# EAGLE board 12x12_multiplexed_NSEW_headers (EAGLE 6.0)

Size 60.96 x 60.96 mm. Coordinates in mm from the lower left corner, seen from the top.
Outline: 0,0 0,60.96 60.96,60.96 60.96,0 0,0
Copper layers (1*16): Top 0.035mm / dielectric 1.5mm / Bottom 0.035mm
Design rules: minimum track width 10mil, minimum drill 24mil, track to track 8mil, track to pad 8mil, pad to pad 8mil, via to via 8mil, smd to smd 8mil, copper to edge 40mil, drill to drill 8mil, minimum pad ring 10mil, minimum via ring 8mil, stop-mask expansion 4mil, vias tented up to drill 0mil, thermal gap 10mil
Holes 3.2 mm at 5.08,5.08 5.08,55.88 55.88,5.08 55.88,55.88

## Footprints (pad centres in the part's own frame; a part is rotated, then mirrored left to right if it is on the bottom)
LED3MM = drill 0.813 octagon: A -1.27,0; K 1.27,0
1X01 = drill 1.016 octagon: 1 0,0

## Placement (x,y rotation side)
00  [LED3MM]  2.54,2.54 0 top
0A  [LED3MM]  53.34,2.54 0 top
0B  [LED3MM]  58.42,2.54 0 top
01  [LED3MM]  7.62,2.54 0 top
1A  [LED3MM]  53.34,7.62 0 top
1B  [LED3MM]  58.42,7.62 0 top
02  [LED3MM]  12.7,2.54 0 top
2A  [LED3MM]  53.34,12.7 0 top
2B  [LED3MM]  58.42,12.7 0 top
03  [LED3MM]  17.78,2.54 0 top
3A  [LED3MM]  53.34,17.78 0 top
3B  [LED3MM]  58.42,17.78 0 top
04  [LED3MM]  22.86,2.54 0 top
4A  [LED3MM]  53.34,22.86 0 top
4B  [LED3MM]  58.42,22.86 0 top
05  [LED3MM]  27.94,2.54 0 top
5A  [LED3MM]  53.34,27.94 0 top
5B  [LED3MM]  58.42,27.94 0 top
06  [LED3MM]  33.02,2.54 0 top
6A  [LED3MM]  53.34,33.02 0 top
6B  [LED3MM]  58.42,33.02 0 top
07  [LED3MM]  38.1,2.54 0 top
7A  [LED3MM]  53.34,38.1 0 top
7B  [LED3MM]  58.42,38.1 0 top
08  [LED3MM]  43.18,2.54 0 top
8A  [LED3MM]  53.34,43.18 0 top
8B  [LED3MM]  58.42,43.18 0 top
09  [LED3MM]  48.26,2.54 0 top
9A  [LED3MM]  53.34,48.26 0 top
9B  [LED3MM]  58.42,48.26 0 top
10  [LED3MM]  2.54,7.62 0 top
11  [LED3MM]  7.62,7.62 0 top
12  [LED3MM]  12.7,7.62 0 top
13  [LED3MM]  17.78,7.62 0 top
14  [LED3MM]  22.86,7.62 0 top
15  [LED3MM]  27.94,7.62 0 top
16  [LED3MM]  33.02,7.62 0 top
17  [LED3MM]  38.1,7.62 0 top
18  [LED3MM]  43.18,7.62 0 top
19  [LED3MM]  48.26,7.62 0 top
20  [LED3MM]  2.54,12.7 0 top
21  [LED3MM]  7.62,12.7 0 top
22  [LED3MM]  12.7,12.7 0 top
23  [LED3MM]  17.78,12.7 0 top
24  [LED3MM]  22.86,12.7 0 top
25  [LED3MM]  27.94,12.7 0 top
26  [LED3MM]  33.02,12.7 0 top
27  [LED3MM]  38.1,12.7 0 top
28  [LED3MM]  43.18,12.7 0 top
29  [LED3MM]  48.26,12.7 0 top
30  [LED3MM]  2.54,17.78 0 top
31  [LED3MM]  7.62,17.78 0 top
32  [LED3MM]  12.7,17.78 0 top
33  [LED3MM]  17.78,17.78 0 top
34  [LED3MM]  22.86,17.78 0 top
35  [LED3MM]  27.94,17.78 0 top
36  [LED3MM]  33.02,17.78 0 top
37  [LED3MM]  38.1,17.78 0 top
38  [LED3MM]  43.18,17.78 0 top
39  [LED3MM]  48.26,17.78 0 top
40  [LED3MM]  2.54,22.86 0 top
41  [LED3MM]  7.62,22.86 0 top
42  [LED3MM]  12.7,22.86 0 top
43  [LED3MM]  17.78,22.86 0 top
44  [LED3MM]  22.86,22.86 0 top
45  [LED3MM]  27.94,22.86 0 top
46  [LED3MM]  33.02,22.86 0 top
47  [LED3MM]  38.1,22.86 0 top
48  [LED3MM]  43.18,22.86 0 top
49  [LED3MM]  48.26,22.86 0 top
50  [LED3MM]  2.54,27.94 0 top
51  [LED3MM]  7.62,27.94 0 top
52  [LED3MM]  12.7,27.94 0 top
53  [LED3MM]  17.78,27.94 0 top
54  [LED3MM]  22.86,27.94 0 top
55  [LED3MM]  27.94,27.94 0 top
56  [LED3MM]  33.02,27.94 0 top
57  [LED3MM]  38.1,27.94 0 top
58  [LED3MM]  43.18,27.94 0 top
59  [LED3MM]  48.26,27.94 0 top
60  [LED3MM]  2.54,33.02 0 top
61  [LED3MM]  7.62,33.02 0 top
62  [LED3MM]  12.7,33.02 0 top
63  [LED3MM]  17.78,33.02 0 top
64  [LED3MM]  22.86,33.02 0 top
65  [LED3MM]  27.94,33.02 0 top
66  [LED3MM]  33.02,33.02 0 top
67  [LED3MM]  38.1,33.02 0 top
68  [LED3MM]  43.18,33.02 0 top
69  [LED3MM]  48.26,33.02 0 top
70  [LED3MM]  2.54,38.1 0 top
71  [LED3MM]  7.62,38.1 0 top
72  [LED3MM]  12.7,38.1 0 top
73  [LED3MM]  17.78,38.1 0 top
74  [LED3MM]  22.86,38.1 0 top
75  [LED3MM]  27.94,38.1 0 top
76  [LED3MM]  33.02,38.1 0 top
77  [LED3MM]  38.1,38.1 0 top
78  [LED3MM]  43.18,38.1 0 top
79  [LED3MM]  48.26,38.1 0 top
80  [LED3MM]  2.54,43.18 0 top
81  [LED3MM]  7.62,43.18 0 top
82  [LED3MM]  12.7,43.18 0 top
83  [LED3MM]  17.78,43.18 0 top
84  [LED3MM]  22.86,43.18 0 top
85  [LED3MM]  27.94,43.18 0 top
86  [LED3MM]  33.02,43.18 0 top
87  [LED3MM]  38.1,43.18 0 top
88  [LED3MM]  43.18,43.18 0 top
89  [LED3MM]  48.26,43.18 0 top
90  [LED3MM]  2.54,48.26 0 top
91  [LED3MM]  7.62,48.26 0 top
92  [LED3MM]  12.7,48.26 0 top
93  [LED3MM]  17.78,48.26 0 top
94  [LED3MM]  22.86,48.26 0 top
95  [LED3MM]  27.94,48.26 0 top
96  [LED3MM]  33.02,48.26 0 top
97  [LED3MM]  38.1,48.26 0 top
98  [LED3MM]  43.18,48.26 0 top
99  [LED3MM]  48.26,48.26 0 top
A0  [LED3MM]  2.54,53.34 0 top
A1  [LED3MM]  7.62,53.34 0 top
A2  [LED3MM]  12.7,53.34 0 top
A3  [LED3MM]  17.78,53.34 0 top
A4  [LED3MM]  22.86,53.34 0 top
A5  [LED3MM]  27.94,53.34 0 top
A6  [LED3MM]  33.02,53.34 0 top
A7  [LED3MM]  38.1,53.34 0 top
A8  [LED3MM]  43.18,53.34 0 top
A9  [LED3MM]  48.26,53.34 0 top
AA  [LED3MM]  53.34,53.34 0 top
AB  [LED3MM]  58.42,53.34 0 top
B0  [LED3MM]  2.54,58.42 0 top
B1  [LED3MM]  7.62,58.42 0 top
B2  [LED3MM]  12.7,58.42 0 top
B3  [LED3MM]  17.78,58.42 0 top
B4  [LED3MM]  22.86,58.42 0 top
B5  [LED3MM]  27.94,58.42 0 top
B6  [LED3MM]  33.02,58.42 0 top
B7  [LED3MM]  38.1,58.42 0 top
B8  [LED3MM]  43.18,58.42 0 top
B9  [LED3MM]  48.26,58.42 0 top
BA  [LED3MM]  53.34,58.42 0 top
BB  [LED3MM]  58.42,58.42 0 top
EH0  [1X01]  55.88,16.51 0 top
EH1  [1X01]  55.88,19.05 0 top
EH2  [1X01]  55.88,21.59 0 top
EH3  [1X01]  55.88,24.13 0 top
EH4  [1X01]  55.88,26.67 0 top
EH5  [1X01]  55.88,29.21 0 top
EH6  [1X01]  55.88,31.75 0 top
EH7  [1X01]  55.88,34.29 0 top
EH8  [1X01]  55.88,36.83 0 top
EH9  [1X01]  55.88,39.37 0 top
EH10  [1X01]  55.88,41.91 0 top
EH11  [1X01]  55.88,44.45 0 top
NH0  [1X01]  16.51,55.88 0 top
NH1  [1X01]  19.05,55.88 0 top
NH2  [1X01]  21.59,55.88 0 top
NH3  [1X01]  24.13,55.88 0 top
NH4  [1X01]  26.67,55.88 0 top
NH5  [1X01]  29.21,55.88 0 top
NH6  [1X01]  31.75,55.88 0 top
NH7  [1X01]  34.29,55.88 0 top
NH8  [1X01]  36.83,55.88 0 top
NH9  [1X01]  39.37,55.88 0 top
NH10  [1X01]  41.91,55.88 0 top
NH11  [1X01]  44.45,55.88 0 top
SH0  [1X01]  16.51,5.08 0 top
SH1  [1X01]  19.05,5.08 0 top
SH2  [1X01]  21.59,5.08 0 top
SH3  [1X01]  24.13,5.08 0 top
SH4  [1X01]  26.67,5.08 0 top
SH5  [1X01]  29.21,5.08 0 top
SH6  [1X01]  31.75,5.08 0 top
SH7  [1X01]  34.29,5.08 0 top
SH8  [1X01]  36.83,5.08 0 top
SH9  [1X01]  39.37,5.08 0 top
SH10  [1X01]  41.91,5.08 0 top
SH11  [1X01]  44.45,5.08 0 top
WH0  [1X01]  5.08,16.51 0 top
WH1  [1X01]  5.08,19.05 0 top
WH2  [1X01]  5.08,21.59 0 top
WH3  [1X01]  5.08,24.13 0 top
WH4  [1X01]  5.08,26.67 0 top
WH5  [1X01]  5.08,29.21 0 top
WH6  [1X01]  5.08,31.75 0 top
WH7  [1X01]  5.08,34.29 0 top
WH8  [1X01]  5.08,36.83 0 top
WH9  [1X01]  5.08,39.37 0 top
WH10  [1X01]  5.08,41.91 0 top
WH11  [1X01]  5.08,44.45 0 top

## Library data of the parts
00 0A 0B 01 1A 1B 02 2A 2B 03 3A 3B 04 4A 4B 05 5A 5B 06 6A 6B 07 7A 7B 08 8A 8B 09 9A 9B 10-99 A0 A1-A9 AA AB B0 B1-B9 BA BB = led
EH0 EH1-EH11 NH0 NH1-NH11 SH0 SH1-SH11 WH0 WH1-WH11 = pinhead

## Nets
C0: 00.K 10.K 20.K 30.K 40.K 50.K 60.K 70.K 80.K 90.K A0.K B0.K NH0.1 SH0.1
C1: 01.K 11.K 21.K 31.K 41.K 51.K 61.K 71.K 81.K 91.K A1.K B1.K NH1.1 SH1.1
C2: 02.K 12.K 22.K 32.K 42.K 52.K 62.K 72.K 82.K 92.K A2.K B2.K NH2.1 SH2.1
C3: 03.K 13.K 23.K 33.K 43.K 53.K 63.K 73.K 83.K 93.K A3.K B3.K NH3.1 SH3.1
C4: 04.K 14.K 24.K 34.K 44.K 54.K 64.K 74.K 84.K 94.K A4.K B4.K NH4.1 SH4.1
C5: 05.K 15.K 25.K 35.K 45.K 55.K 65.K 75.K 85.K 95.K A5.K B5.K NH5.1 SH5.1
C6: 06.K 16.K 26.K 36.K 46.K 56.K 66.K 76.K 86.K 96.K A6.K B6.K NH6.1 SH6.1
C7: 07.K 17.K 27.K 37.K 47.K 57.K 67.K 77.K 87.K 97.K A7.K B7.K NH7.1 SH7.1
C8: 08.K 18.K 28.K 38.K 48.K 58.K 68.K 78.K 88.K 98.K A8.K B8.K NH8.1 SH8.1
C9: 09.K 19.K 29.K 39.K 49.K 59.K 69.K 79.K 89.K 99.K A9.K B9.K NH9.1 SH9.1
C10: 0A.K 1A.K 2A.K 3A.K 4A.K 5A.K 6A.K 7A.K 8A.K 9A.K AA.K BA.K NH10.1 SH10.1
C11: 0B.K 1B.K 2B.K 3B.K 4B.K 5B.K 6B.K 7B.K 8B.K 9B.K AB.K BB.K NH11.1 SH11.1
R0: 00.A 0A.A 0B.A 01.A 02.A 03.A 04.A 05.A 06.A 07.A 08.A 09.A EH0.1 WH0.1
R1: 1A.A 1B.A 10.A 11.A 12.A 13.A 14.A 15.A 16.A 17.A 18.A 19.A EH1.1 WH1.1
R2: 2A.A 2B.A 20.A 21.A 22.A 23.A 24.A 25.A 26.A 27.A 28.A 29.A EH2.1 WH2.1
R3: 3A.A 3B.A 30.A 31.A 32.A 33.A 34.A 35.A 36.A 37.A 38.A 39.A EH3.1 WH3.1
R4: 4A.A 4B.A 40.A 41.A 42.A 43.A 44.A 45.A 46.A 47.A 48.A 49.A EH4.1 WH4.1
R5: 5A.A 5B.A 50.A 51.A 52.A 53.A 54.A 55.A 56.A 57.A 58.A 59.A EH5.1 WH5.1
R6: 6A.A 6B.A 60.A 61.A 62.A 63.A 64.A 65.A 66.A 67.A 68.A 69.A EH6.1 WH6.1
R7: 7A.A 7B.A 70.A 71.A 72.A 73.A 74.A 75.A 76.A 77.A 78.A 79.A EH7.1 WH7.1
R8: 8A.A 8B.A 80.A 81.A 82.A 83.A 84.A 85.A 86.A 87.A 88.A 89.A EH8.1 WH8.1
R9: 9A.A 9B.A 90.A 91.A 92.A 93.A 94.A 95.A 96.A 97.A 98.A 99.A EH9.1 WH9.1
R10: A0.A A1.A A2.A A3.A A4.A A5.A A6.A A7.A A8.A A9.A AA.A AB.A EH10.1 WH10.1
R11: B0.A B1.A B2.A B3.A B4.A B5.A B6.A B7.A B8.A B9.A BA.A BB.A EH11.1 WH11.1

## Tracks (layer width: path | path; a pad name or v marks a point on that pad's centre or on a via)
C0  (13 unrouted)
C1  (13 unrouted)
C2  (13 unrouted)
C3  (13 unrouted)
C4  (13 unrouted)
C5  (13 unrouted)
C6  (13 unrouted)
C7  (13 unrouted)
C8  (13 unrouted)
C9  (13 unrouted)
C10  (13 unrouted)
C11  (13 unrouted)
R0  (13 unrouted)
R1  (13 unrouted)
R2  (13 unrouted)
R3  (13 unrouted)
R4  (13 unrouted)
R5  (13 unrouted)
R6  (13 unrouted)
R7  (13 unrouted)
R8  (13 unrouted)
R9  (13 unrouted)
R10  (13 unrouted)
R11  (13 unrouted)